# EAGLE board rgbcontroller-2 (EAGLE 8.4.1)
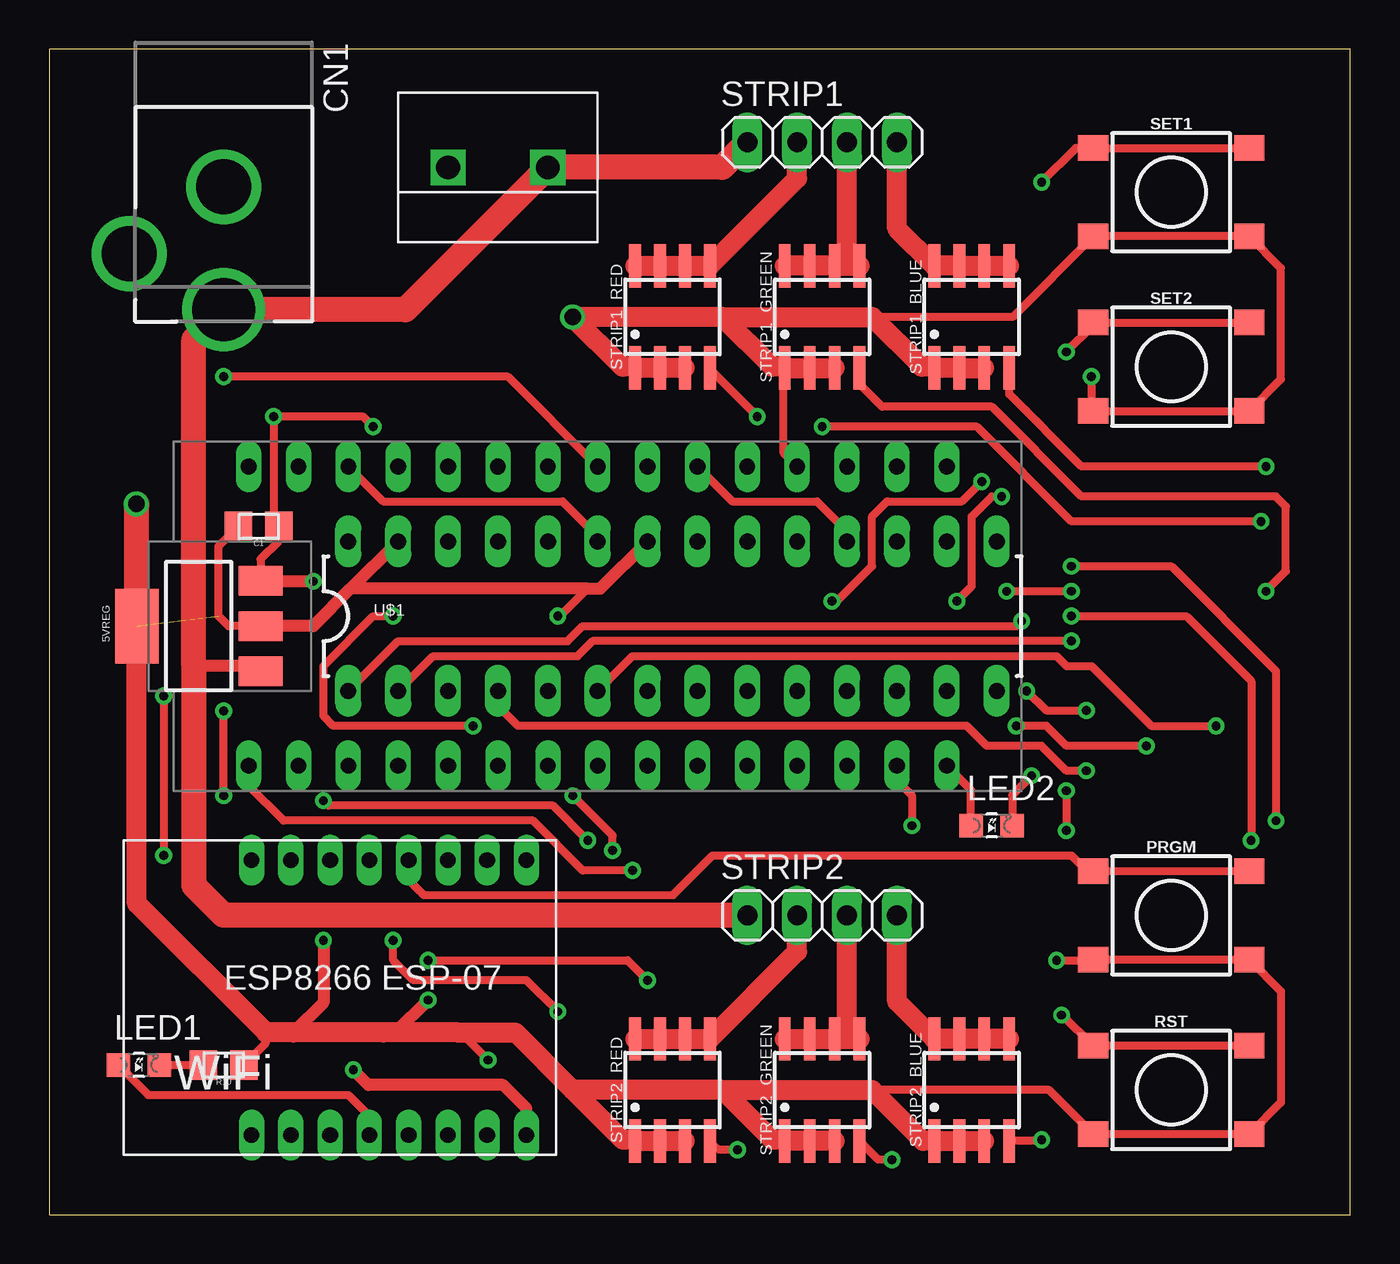
[diagram p0: board, top side]
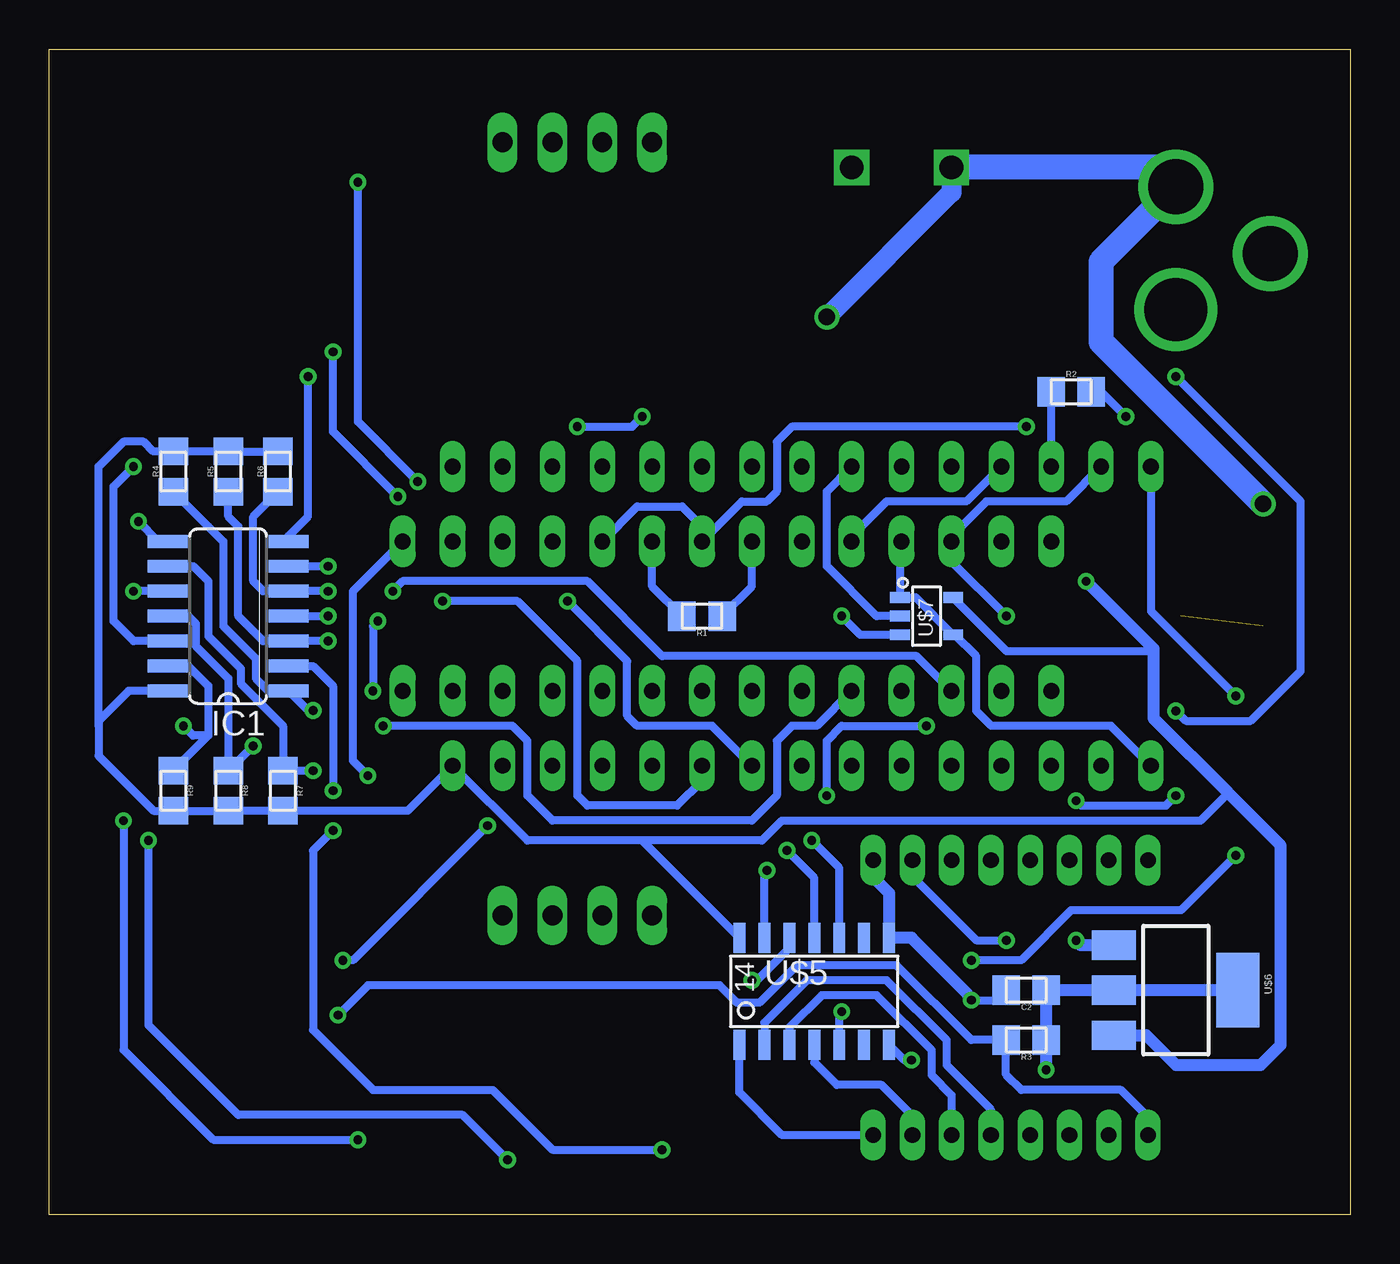
[diagram p1: board, bottom side, seen from below]

Size 66.27 x 59.36 mm. Coordinates in mm from the lower left corner, seen from the top.
Outline: 0,0 66.27,0 66.27,59.36 0,59.36 0,0
Copper layers (1*16): Top 0.035mm / dielectric 1.5mm / Bottom 0.035mm
Design rules "DRC Advanced Circuits": minimum track width 10mil, minimum drill 15mil, track to track 6mil, track to pad 6mil, pad to pad 6mil, via to via 6mil, smd to smd 6mil, copper to edge 40mil, drill to drill 6mil, minimum pad ring 10mil, minimum via ring 8mil, stop-mask expansion 4mil, vias tented up to drill 0mil, thermal gap 10mil

## Footprints (pad centres in the part's own frame; a part is rotated, then mirrored left to right if it is on the bottom)
SOT223 = smd 1.5 x 2.235: 1 -2.3,-3.15; 2 0,-3.15; 3 2.3,-3.15 | smd 3.8 x 2.2: 4 0,3.15
0805 = smd 1.4 x 1.5: 1 -1.025,0; 2 1.025,0
DCJACK_2MM_PTH = drill 2.8: GND 0,7.35; GNDBREAK 4.8,10.75 | drill 3.2: PWR 0,13.6
SO14 = smd 0.66 x 2.032: 1 -3.81,-3.073; 2 -2.54,-3.073; 3 -1.27,-3.073; 4 0,-3.073; 5 1.27,-3.073; 6 2.54,-3.073; 7 3.81,-3.073; 8 3.81,3.073; 9 2.54,3.073; 10 1.27,3.073; 11 0,3.073; 12 -1.27,3.073; 13 -2.54,3.073; 14 -3.81,3.073
LED-805 = smd 1.2 x 1.2: A 0,-1.05; C 0,1.05
TACTILE_SWITCH_SMD_6.2MM_TALL = smd 1.55 x 1.3: A1 -3.975,-2.25; A2 3.975,-2.25; B1 -3.975,2.25; B2 3.975,2.25
1X04 = drill 1.016 long: 1 -3.81,0; 2 -1.27,0; 3 1.27,0; 4 3.81,0
SOIC-08 = smd 0.6 x 2.2: 1 -1.905,-2.6; 2 -0.635,-2.6; 3 0.635,-2.6; 4 1.905,-2.6; 5 1.905,2.6; 6 0.635,2.6; 7 -0.635,2.6; 8 -1.905,2.6
DIL28-3 = drill 0.813 long: 1 -16.51,-3.81; 2 -13.97,-3.81; 3 -11.43,-3.81; 4 -8.89,-3.81; 5 -6.35,-3.81; 6 -3.81,-3.81; 7 -1.27,-3.81; 8 1.27,-3.81; 9 3.81,-3.81; 10 6.35,-3.81; 11 8.89,-3.81; 12 11.43,-3.81; 13 13.97,-3.81; 14 16.51,-3.81; 15 16.51,3.81; 16 13.97,3.81; 17 11.43,3.81; 18 8.89,3.81; 19 6.35,3.81; 20 3.81,3.81; 21 1.27,3.81; 22 -1.27,3.81; 23 -3.81,3.81; 24 -6.35,3.81; 25 -8.89,3.81; 26 -11.43,3.81; 27 -13.97,3.81; 28 -16.51,3.81
ARDUINO_NANO = drill 0.8 long: 3.3V 1.27,36.83; 5V 1.27,11.43; A0 1.27,31.75; A1 1.27,29.21; A2 1.27,26.67; A3 1.27,24.13; A4 1.27,21.59; A5 1.27,19.05; A6 1.27,16.51; A7 1.27,13.97; AREF 1.27,34.29; D0(RX) 16.51,6.35; D1(TX) 16.51,3.81; D2 16.51,13.97; D3 16.51,16.51; D4 16.51,19.05; D5 16.51,21.59; D6 16.51,24.13; D7 16.51,26.67; D8 16.51,29.21; D9 16.51,31.75; D10 16.51,34.29; D11 16.51,36.83; D12 16.51,39.37; D13 1.27,39.37; GND 1.27,6.35; GND1 16.51,11.43; RST 1.27,8.89; RST1 16.51,8.89; VIN 1.27,3.81
DG301-02P = drill 1.2 square: 1 2.54,3.81; 2 7.62,3.81
ESP8266_ESP-07 = drill 0.8 long: P$1 6.5,-15; P$2 8.5,-15; P$3 10.5,-15; P$4 12.5,-15; P$5 14.5,-15; P$6 16.5,-15; P$7 18.5,-15; P$8 20.5,-15; P$9 20.5,-1; P$10 18.5,-1; P$11 16.5,-1; P$12 14.5,-1; P$13 12.5,-1; P$14 10.5,-1; P$15 8.5,-1; P$16 6.5,-1
SOIC-14 = smd 0.61 x 1.524: 1 -4.445,-2.794; 2 -3.175,-2.794; 3 -1.905,-2.794; 4 -0.635,-2.794; 5 0.635,-2.794; 6 1.905,-2.794; 7 3.175,-2.794; 8 3.175,2.667; 9 1.905,2.667; 10 0.635,2.667; 11 -0.635,2.667; 12 -1.905,2.667; 13 -3.175,2.667; 14 -4.445,2.667
SOT-23-5 = smd 1 x 0.55: 1 -1.35,0.95; 2 -1.35,0; 3 -1.35,-0.95; 4 1.35,-0.95; 5 1.35,0.95

## Placement (x,y rotation side)
5VREG  [SOT223]  7.62,29.97 90 top
C1  .1µF  [0805]  10.67,35.05 180 top
C2  1µF  [0805]  16.51,11.43 180 bottom
CN1  [DCJACK_2MM_PTH]  8.89,59.69 180 top
IC1  74HC04D  [SO14]  57.15,30.48 90 bottom
LED1  Red  [LED-805]  4.57,7.62 270 top
LED2  [LED-805]  48.01,19.81 270 top
PRGM  [TACTILE_SWITCH_SMD_6.2MM_TALL]  57.15,15.24 0 top
R1  2.2k  [0805]  33.02,30.48 180 bottom
R2  10k  [0805]  14.22,41.91 0 bottom
R3  10k  [0805]  16.51,8.89 180 bottom
R4  10k  [0805]  59.94,37.85 90 bottom
R5  10k  [0805]  57.15,37.85 90 bottom
R6  10k  [0805]  54.61,37.85 90 bottom
R7  10k  [0805]  54.36,21.59 270 bottom
R8  10k  [0805]  57.15,21.59 270 bottom
R9  10k  [0805]  59.94,21.59 270 bottom
R10  100  [0805]  8.89,7.62 180 top
RST  [TACTILE_SWITCH_SMD_6.2MM_TALL]  57.15,6.35 0 top
SET1  [TACTILE_SWITCH_SMD_6.2MM_TALL]  57.15,52.07 0 top
SET2  [TACTILE_SWITCH_SMD_6.2MM_TALL]  57.15,43.18 0 top
STRIP1  [1X04]  39.37,54.61 0 top
STRIP1_BLUE  MDS1656  [SOIC-08]  46.99,45.72 0 top
STRIP1_GREEN  MDS1656  [SOIC-08]  39.37,45.72 0 top
STRIP1_RED  MDS1656  [SOIC-08]  31.75,45.72 0 top
STRIP2  [1X04]  39.37,15.24 0 top
STRIP2_BLUE  MDS1656  [SOIC-08]  46.99,6.35 0 top
STRIP2_GREEN  MDS1656  [SOIC-08]  39.37,6.35 0 top
STRIP2_RED  MDS1656  [SOIC-08]  31.75,6.35 0 top
U$1  TLC5940  [DIL28-3]  31.75,30.48 0 top
U$2  ARDUINO_NANO  [ARDUINO_NANO]  49.53,21.59 90 top
U$3  TERMINAL_BLOCK_DG301-02P  [DG301-02P]  27.94,57.15 180 top
U$4  ESP8266_ESP-07  [ESP8266_ESP-07]  3.81,19.05 0 top
U$5  [SOIC-14]  26.67,11.43 0 bottom
U$6  TLV1117LV33  [SOT223]  8.89,11.43 270 bottom
U$7  SN74LVC1G08  [SOT-23-5]  21.59,30.48 0 bottom

## Library data of the parts
5VREG C1 C2 CN1 LED1 LED2 PRGM R1-R10 RST SET1 SET2 STRIP1 STRIP1_BLUE STRIP1_GREEN STRIP1_RED STRIP2 STRIP2_BLUE STRIP2_GREEN STRIP2_RED U$1-U$7 = HyTechDevices
IC1 = 74xx-eu; SPICEPREFIX: I

## Nets
+3V3: C2.1 R3.1 U$4.P$8 U$5.1 U$6.2 U$6.4
+5V: 5VREG.3 C1.1 IC1.14 LED2.A R2.2 R4.2 R5.2 R6.2 R7.2 R8.2 R9.2 U$1.19 U$1.21 U$2.VIN U$5.14 U$6.3 U$7.5
+12V: 5VREG.1 CN1.PWR STRIP1.1 STRIP2.1 U$3.1
BLANK: R2.1 U$1.23 U$2.D10
GND: 5VREG.2 5VREG.4 C1.2 C2.2 CN1.GND IC1.7 PRGM.A1 PRGM.A2 R1.1 R10.1 RST.A1 RST.A2 SET1.A1 SET1.A2 SET2.A1 SET2.A2 STRIP1_BLUE.1 STRIP1_BLUE.2 STRIP1_BLUE.3 STRIP1_GREEN.1 STRIP1_GREEN.2 STRIP1_GREEN.3 STRIP1_RED.1 STRIP1_RED.2 STRIP1_RED.3 STRIP2_BLUE.1 STRIP2_BLUE.2 STRIP2_BLUE.3 STRIP2_GREEN.1 STRIP2_GREEN.2 STRIP2_GREEN.3 STRIP2_RED.1 STRIP2_RED.2 STRIP2_RED.3 U$1.22 U$1.27 U$2.GND U$2.GND1 U$3.2 U$4.P$9 U$5.7 U$5.8 U$6.1 U$7.3
GNDBREAK: CN1.GNDBREAK
MISO: U$2.D12 U$5.12
MISO_33: U$4.P$6 U$5.3
MOSI: U$1.26 U$2.D11 U$5.11
MOSI_33: U$4.P$7 U$5.4
N$1: STRIP2.2 STRIP2_RED.5 STRIP2_RED.6 STRIP2_RED.7 STRIP2_RED.8
N$2: STRIP1.2 STRIP1_RED.5 STRIP1_RED.6 STRIP1_RED.7 STRIP1_RED.8
N$3: IC1.2 STRIP2_RED.4
N$4: IC1.4 STRIP2_GREEN.4
N$5: PRGM.B1 PRGM.B2 U$4.P$12
N$6: R1.2 U$1.20
N$7: U$1.18 U$2.D3
N$8: LED1.A U$4.P$4
N$9: IC1.8 STRIP1_RED.4
N$10: IC1.10 STRIP1_GREEN.4
N$11: IC1.12 STRIP1_BLUE.4
N$12: IC1.6 STRIP2_BLUE.4
N$13: IC1.1 R4.1 U$1.1
N$14: IC1.3 R5.1 U$1.2
N$15: STRIP1.3 STRIP1_GREEN.5 STRIP1_GREEN.6 STRIP1_GREEN.7 STRIP1_GREEN.8
N$16: STRIP1.4 STRIP1_BLUE.5 STRIP1_BLUE.6 STRIP1_BLUE.7 STRIP1_BLUE.8
N$17: STRIP2.3 STRIP2_GREEN.5 STRIP2_GREEN.6 STRIP2_GREEN.7 STRIP2_GREEN.8
N$18: STRIP2.4 STRIP2_BLUE.5 STRIP2_BLUE.6 STRIP2_BLUE.7 STRIP2_BLUE.8
N$19: IC1.5 R6.1 U$1.3
N$20: IC1.13 R9.1 U$1.6
N$21: R3.2 RST.B1 RST.B2 U$4.P$1
N$22: IC1.11 R8.1 U$1.5
N$23: IC1.9 R7.1 U$1.4
N$24: LED2.C U$1.15
N$25: LED1.C R10.2
SCK: U$1.25 U$2.D13 U$5.13 U$7.1 U$7.4
SCK_33: U$4.P$5 U$5.2
SET1: SET1.B1 SET1.B2 U$2.A5
SET2: SET2.B1 SET2.B2 U$2.A6
SS_ESP8266: U$2.D5 U$5.10
SS_ESP8266_33: U$4.P$10 U$5.5
SS_TLC5940: U$2.D6 U$7.2
XLAT: U$1.24 U$2.D9

## Tracks (layer width: path | path; a pad name or v marks a point on that pad's centre or on a via)
+3V3  (via drill 0.45)
  Top 0.61: U$4.P$8 24.31,5.41 23.11,6.6 16.26,6.6 v15.49,7.37
  Bottom 0.406: U$4.P$8 28.94,4.05 31.11,6.22 U$5.1
  Bottom 0.61: U$6.4 U$6.2 C2.1 R3.1 v15.48,7.38 v15.49,7.37
+5V  (via drill 0.45)
  Top 0.406: 5VREG.3 10.77,33.38 11.68,34.29 C1.1 11.43,35.31 v11.43,40.64 16,40.64 v16.51,40.13 | LED2.A 46.96,21.62 U$2.VIN
  Top 0.61: 5VREG.3 10.78,32.26 v13.46,32.26
  Bottom 0.406: R2.2 12.7,41.91 v11.43,40.64 | R6.2 R5.2 R4.2 60.97,38.87 61.47,39.37 62.48,39.37 63.75,38.1 63.75,24.89 | U$1.19 36.32,36.07 34.04,36.07 33.02,35.05 U$1.21 30.99,36.32 29.72,36.32 29.21,36.83 29.21,39.37 28.45,40.13 v16.51,40.13 | U$5.14 36.07,19.05 | 36.07,19.05 41.91,19.05 U$2.VIN 48.02,20.56 R7.2 R8.2 R9.2 60.95,20.56 63.75,23.37 63.75,24.89 | 36.07,19.05 29.97,19.05 28.96,20.07 7.62,20.07 6.22,21.46 | U$7.5 17.51,28.7 10.16,28.7 10.03,28.83 | IC1.14 62.23,26.67 63.75,25.15 63.75,24.89
  Bottom 0.61: v13.46,32.26 10.03,28.83 10.03,25.27 6.22,21.46 3.56,18.8 3.56,8.64 4.57,7.62 8.89,7.62 10.4,9.13 U$6.3
+12V
  Top 0.61: 5VREG.1 10.53,27.94 7.37,27.94
  Top 1.27: STRIP2.1 8.89,15.24 7.37,16.76 7.37,27.94 7.37,44.57 CN1.PWR 18.15,46.09 U$3.1 34.29,53.34 STRIP1.1
BLANK
  Top 0.406: U$2.D10 17.02,36.32 26.16,36.32 27.94,34.54 U$1.23
  Bottom 0.406: U$2.D10 R2.1
GND  (via drill 0.45, 0.85)  (1 unrouted)
  Top 0.406: 41.91,45.72 49.08,45.72 SET1.A1 SET1.A2 62.74,48.21 62.74,42.54 SET2.A2 SET2.A1 53.09,41.02 v53.09,42.67 | 5VREG.2 9.14,29.97 8.64,30.48 8.64,34.05 C1.2 | R10.1 11.05,8.75 11.05,9.27 | 41.91,6.35 50.92,6.35 RST.A1 RST.A2 62.74,5.71 62.74,11.38 PRGM.A2 PRGM.A1 53.14,12.95 v51.31,12.95 | U$2.GND1 37.41,38.8 37.41,43.18 | U$2.GND 43.18,22.1 43.94,21.34 v43.94,19.81 | v25.91,30.48 26.04,30.48 27.43,31.88 | v22.35,7.87 20.95,9.27 20.83,9.27
  Top 0.61: 15.37,31.88 13.46,29.97 5VREG.2 | 15.37,31.88 U$1.27 | U$1.22 28.07,31.88 27.43,31.88 15.37,31.88 | 12.45,9.27 13.97,10.8 v13.97,13.97 | v19.3,10.92 17.65,9.27 17.02,9.27
  Top 1.016: STRIP2_GREEN.3 STRIP2_GREEN.2 STRIP2_GREEN.1 37.41,3.81 36.83,3.81 34.29,6.35 | 26.67,6.35 29.21,3.81 29.79,3.81 STRIP2_RED.1 STRIP2_RED.2 STRIP2_RED.3 | 34.29,6.35 26.67,6.35 | 34.29,6.35 41.91,6.35 44.51,3.75 STRIP2_BLUE.1 STRIP2_BLUE.2 STRIP2_BLUE.3 | 26.67,6.35 23.75,9.27 20.83,9.27 17.02,9.27 12.45,9.27 11.05,9.27 4.47,15.85 5VREG.4 | 34.29,45.72 v26.67,45.72 29.21,43.18 29.79,43.18 STRIP1_RED.1 STRIP1_RED.2 STRIP1_RED.3 | 34.29,45.72 41.91,45.72 44.45,43.18 45.02,43.18 STRIP1_BLUE.1 STRIP1_BLUE.2 STRIP1_BLUE.3 | 34.29,45.72 36.83,43.18 37.41,43.18 STRIP1_GREEN.1 STRIP1_GREEN.2 STRIP1_GREEN.3
  Top 1.27: v4.45,36.19 4.47,36.17 5VREG.4
  Bottom 0.406: v19.3,10.92 18.04,10.92 C2.2 | R1.1 30.48,32 U$1.22 | IC1.7 54.08,34.57 53.09,35.56 v53.09,42.67 | v43.94,19.81 50.8,12.95 v51.31,12.95 | U$7.3 24.96,29.53 v25.91,30.48 | U$5.7 22.73,7.87 v22.35,7.87
  Bottom 0.61: v13.97,13.97 13.73,13.73 U$6.1 | U$4.P$9 24.13,17.87 24.13,17.02 23.5,16.38 U$5.8 22.35,14.1 19.56,11.3 v19.3,10.92
  Bottom 1.016: v26.67,45.72 20.32,52.07 U$3.2
  Bottom 1.27: v4.45,36.19 12.7,44.45 12.7,48.53 CN1.GND 9.89,53.34 U$3.2
MISO  (via drill 0.45)
  Top 0.406: v5.84,26.42 v5.84,18.29 | v30.48,11.94 29.46,12.95 v19.3,12.95
  Bottom 0.406: U$2.D12 10.16,30.73 v5.84,26.42 | v5.84,18.29 8.64,15.49 14.22,15.49 16.76,12.95 v19.3,12.95 | U$5.12 28.57,13.59 30.23,11.94 v30.48,11.94
MISO_33
  Bottom 0.406: U$4.P$6 20.31,6.09 21.34,7.11 21.34,8.38 24.13,11.18 26.92,11.18 28.57,9.52 U$5.3
MOSI  (via drill 0.45)
  Top 0.406: v28.7,18.54 28.7,19.3 v26.67,21.34 | v21.59,24.89 14.48,24.89 13.97,25.4 13.97,27.94 16.51,30.48 v17.53,30.48
  Bottom 0.406: U$2.D11 14.48,36.32 18.54,36.32 20.32,34.54 U$1.26 20.32,33.27 v17.53,30.48 | U$5.11 27.3,17.14 v28.7,18.54 | v26.67,21.34 26.67,24.13 25.91,24.89 v21.59,24.89
MOSI_33
  Bottom 0.406: U$5.4 27.3,7.75 26.16,6.6 23.88,6.6 22.31,5.04 U$4.P$7
N$1
  Top 1.016: STRIP2_RED.8 STRIP2_RED.7 STRIP2_RED.6 STRIP2_RED.5 38.1,13.39 STRIP2.2
N$2
  Top 1.016: STRIP1_RED.8 STRIP1_RED.7 STRIP1_RED.6 STRIP1_RED.5 38.1,52.77 STRIP1.2
N$3  (via drill 0.45)
  Top 0.406: v51.82,21.59 v51.82,19.56 | v35.05,3.3 34.1,3.3 STRIP2_RED.4
  Bottom 0.406: IC1.2 52.83,27.94 51.82,26.92 v51.82,21.59 | v51.82,19.56 52.83,18.54 52.83,9.4 49.78,6.35 43.69,6.35 40.64,3.3 v35.05,3.3
N$4  (via drill 0.45)
  Top 0.406: v52.07,30.48 57.91,30.48 61.21,27.18 v61.21,19.05 | v42.93,2.79 42.23,2.79 STRIP2_GREEN.4
  Bottom 0.406: IC1.4 v52.07,30.48 | v61.21,19.05 61.21,9.65 56.64,5.08 45.21,5.08 v42.93,2.79
N$5
  Top 0.406: PRGM.B2 PRGM.B1 52.87,17.49 52.07,18.29 33.78,18.29 31.77,16.28 19.07,16.28 18.31,17.05 U$4.P$12
N$6
  Bottom 0.406: R1.2 35.56,32 U$1.20
N$7
  Top 0.406: U$2.D3 34.8,36.32 39.12,36.32 40.64,34.8 U$1.18
N$8
  Top 0.406: LED1.A 5.05,6.1 15.24,6.1 16.31,5.03 U$4.P$4
N$9  (via drill 0.45)
  Top 0.406: v61.72,35.31 52.07,35.31 47.24,40.13 v39.37,40.13 | v36.07,40.64 33.66,43.05 STRIP1_RED.4
  Bottom 0.406: IC1.8 60.71,34.29 v61.72,35.31 | v39.37,40.13 36.58,40.13 v36.07,40.64
N$10  (via drill 0.45)
  Top 0.406: v61.98,31.75 62.99,32.77 62.99,36.07 62.48,36.58 52.58,36.58 48.01,41.15 42.42,41.15 41.27,42.29 STRIP1_GREEN.4
  Bottom 0.406: IC1.10 v61.98,31.75
N$11  (via drill 0.45)
  Top 0.406: v61.98,38.1 52.58,38.1 48.9,41.78 STRIP1_BLUE.4
  Bottom 0.406: IC1.12 61.98,29.21 62.99,30.23 62.99,37.08 v61.98,38.1
N$12  (via drill 0.45)
  Top 0.406: v52.07,33.02 57.15,33.02 62.48,27.69 v62.48,20.07 | v50.55,3.81 50.49,3.75 STRIP2_BLUE.4
  Bottom 0.406: IC1.6 v52.07,33.02 | v62.48,20.07 62.48,8.38 57.91,3.81 v50.55,3.81
N$13  (via drill 0.45)
  Top 0.406: U$1.1 17.78,29.21 26.42,29.21 27.18,29.97 49.28,29.97 v49.53,30.23 | v49.78,26.67 50.78,25.68 v52.83,25.68
  Bottom 0.406: R4.1 58.17,35.05 58.16,35.05 57.4,34.29 57.4,29.97 55.75,28.32 55.75,27.3 55.12,26.67 IC1.1 53.08,25.68 v52.83,25.68 | v49.53,30.23 49.78,29.97 v49.78,26.67
N$14  (via drill 0.45)
  Top 0.406: U$1.2 19.56,28.45 26.92,28.45 27.69,29.21 v52.07,29.21
  Bottom 0.406: R5.1 57.15,35.56 56.64,35.05 56.64,30.48 55.37,29.21 IC1.3 v52.07,29.21
N$15
  Top 1.016: STRIP1_GREEN.8 STRIP1_GREEN.7 STRIP1_GREEN.6 STRIP1_GREEN.5 40.64,48.95 STRIP1.3
N$16
  Top 1.016: STRIP1_BLUE.5 STRIP1_BLUE.6 STRIP1_BLUE.7 STRIP1_BLUE.8 43.18,50.22 STRIP1.4
N$17
  Top 1.016: STRIP2_GREEN.8 STRIP2_GREEN.7 STRIP2_GREEN.6 STRIP2_GREEN.5 40.64,9.59 STRIP2.3
N$18
  Top 1.016: STRIP2_BLUE.5 STRIP2_BLUE.6 STRIP2_BLUE.7 STRIP2_BLUE.8 43.18,10.85 STRIP2.4
N$19  (via drill 0.45)
  Top 0.406: v48.77,31.75 v52.07,31.75
  Bottom 0.406: R6.1 55.88,35.55 55.88,32.26 55.37,31.75 IC1.5 v52.07,31.75 | U$1.3 22.1,28.45 35.05,28.45 38.86,32.26 48.26,32.26 v48.77,31.75
N$20  (via drill 0.45)
  Top 0.406: U$1.6 29.72,28.45 51.31,28.45 51.82,27.94 53.09,27.94 56.13,24.89 v59.44,24.89
  Bottom 0.406: IC1.13 59.18,27.94 58.17,26.92 58.17,24.39 | R9.1 58.17,24.39 | 58.17,24.39 58.94,24.39 v59.44,24.89
N$21  (via drill 0.45)
  Top 0.406: RST.B2 RST.B1 51.62,10.16 v51.56,10.16
  Bottom 0.406: U$4.P$1 10.31,4.98 11.68,6.35 16.76,6.35 17.54,7.12 R3.2 19.3,8.89 23.11,12.7 28.19,12.7 30.1,10.8 31.24,10.8 32.13,11.68 50.04,11.68 v51.56,10.16
N$22  (via drill 0.45)
  Top 0.406: v49.25,24.89 50.8,24.89 51.82,23.88 v55.88,23.88
  Bottom 0.406: IC1.11 59.18,30.48 58.8,30.1 58.8,28.96 57.15,27.3 R8.1 v55.88,23.88 | U$1.5 27.18,24.89 28.45,24.89 29.21,24.13 29.21,21.34 30.48,20.07 40.64,20.07 41.91,21.34 41.91,24.13 42.67,24.89 v49.25,24.89
N$23  (via drill 0.45)
  Top 0.406: U$1.4 22.86,25.91 23.88,24.89 46.74,24.89 47.75,23.88 50.55,23.88 51.82,22.61 v52.83,22.61
  Bottom 0.406: IC1.9 58.93,33.02 58.17,32.26 58.17,29.46 56.52,27.81 56.52,27.05 54.36,24.89 R7.1 52.84,22.62 v52.83,22.61
N$24  (via drill 0.45)
  Top 0.406: v50.04,22.35 49.06,21.37 LED2.C
  Bottom 0.406: v50.04,22.35 50.8,23.11 50.8,31.75 U$1.15
N$25
  Top 0.406: LED1.C R10.2
SCK  (via drill 0.45)
  Top 0.406: U$2.D13 10.16,21.84 11.94,20.07 24.64,20.07 27.18,17.53 v29.72,17.53
  Bottom 0.406: U$1.25 22.94,34.21 U$7.1 22.14,31.43 U$7.4 20.13,29.53 19.05,28.45 19.05,25.65 18.29,24.89 12.19,24.89 U$2.D13 | U$5.13 29.84,17.4 v29.72,17.53
SCK_33
  Bottom 0.406: U$4.P$5 18.31,5.36 20.57,7.62 20.57,8.89 23.62,11.94 27.69,11.94 29.84,9.78 U$5.2
SET1  (via drill 0.45)
  Top 0.406: SET1.B2 SET1.B1 52.29,54.32 v50.55,52.58 | v39.88,31.24 40.13,31.24 41.91,33.02 41.91,35.56 42.67,36.32 46.48,36.32 v47.5,37.34
  Bottom 0.406: U$2.A5 32.51,24.89 36.32,24.89 36.83,25.4 36.83,28.19 v39.88,31.24 | v47.5,37.34 50.55,40.39 v50.55,52.58
SET2  (via drill 0.45)
  Top 0.406: SET2.B2 SET2.B1 53.17,45.3 v51.82,43.94 | v46.23,31.24 46.99,32 46.99,35.56 48.01,36.58 v48.51,36.58
  Bottom 0.406: U$2.A6 33.02,22.1 34.29,20.83 38.86,20.83 39.37,21.34 39.37,28.19 42.42,31.24 v46.23,31.24 | v48.51,36.58 51.82,39.88 v51.82,43.94
SS_ESP8266  (via drill 0.45)
  Top 0.406: v27.43,19.05 25.65,20.83 14.22,20.83 v13.97,21.08 | U$2.D5 23.37,42.67 v8.89,42.67 | v8.89,21.34 v8.89,25.65
  Bottom 0.406: U$5.10 26.04,17.65 v27.43,19.05 | v8.89,42.67 2.54,36.32 2.54,27.69 5.08,25.15 8.38,25.15 v8.89,25.65 | v13.97,21.08 13.72,20.83 9.4,20.83 v8.89,21.34
SS_ESP8266_33  (via drill 0.45)
  Top 0.406: 25.91,10.41 v25.91,10.34 24.31,11.94 18.54,11.94 17.53,12.95 v17.53,13.97
  Bottom 0.406: U$5.5 26.04,10.21 v25.91,10.34 | U$4.P$10 22.1,17.84 22.1,17.02 19.05,13.97 v17.53,13.97
SS_TLC5940
  Bottom 0.406: U$7.2 24.13,30.48 26.67,33.02 26.67,36.83 U$2.D6
XLAT
  Bottom 0.406: U$2.D9 19.56,36.32 23.62,36.32 25.4,34.54 U$1.24